# Altium PCB 普通背景抑制原理图-W-20251019 .PcbDoc
Units mm, origin at the board's own origin, x right, y up, seen from the top; angles counter-clockwise.
Board outline 28.9 x 9.6 mm, 4 copper layers (TopLayer, MidLayer1, MidLayer14, BottomLayer); 54 components, 29 nets, 136 pads, 38 vias.
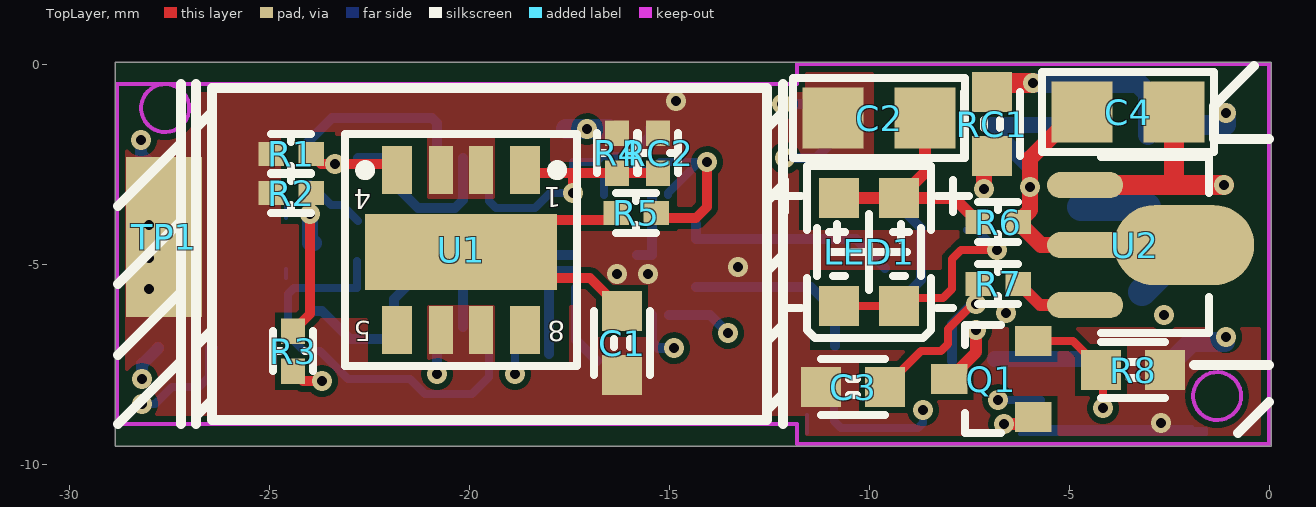
[diagram p0: TopLayer view]
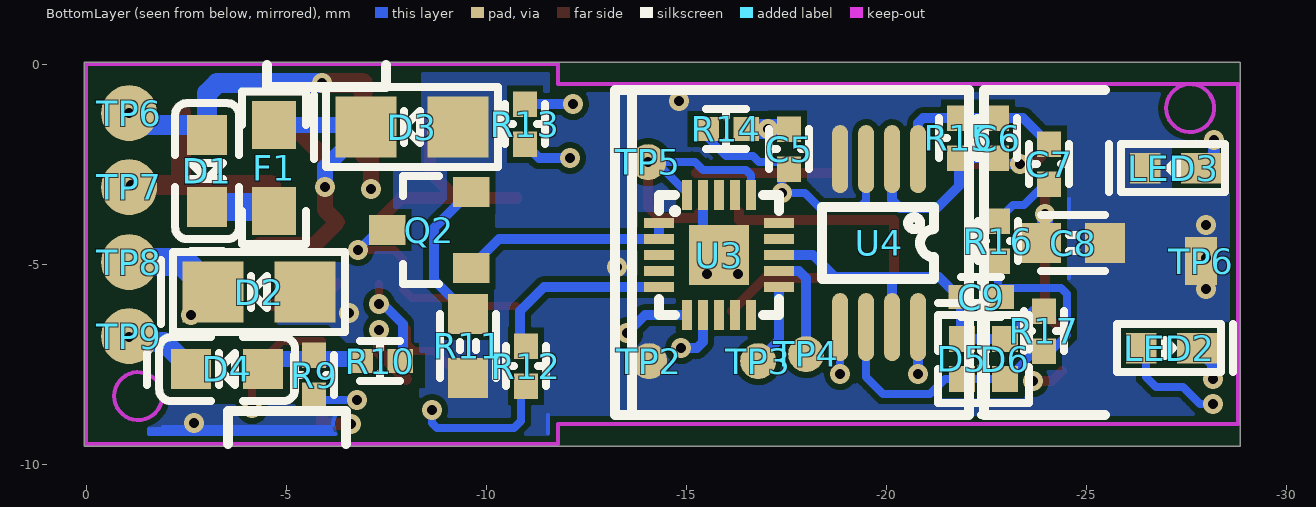
[diagram p1: BottomLayer view, seen from below]
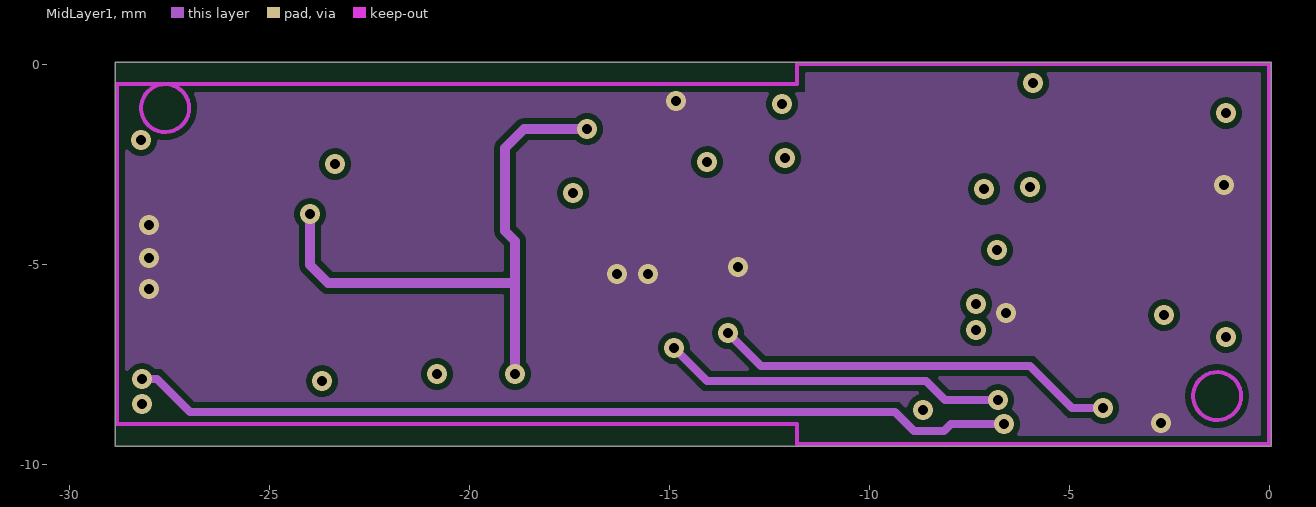
[diagram p2: MidLayer1]
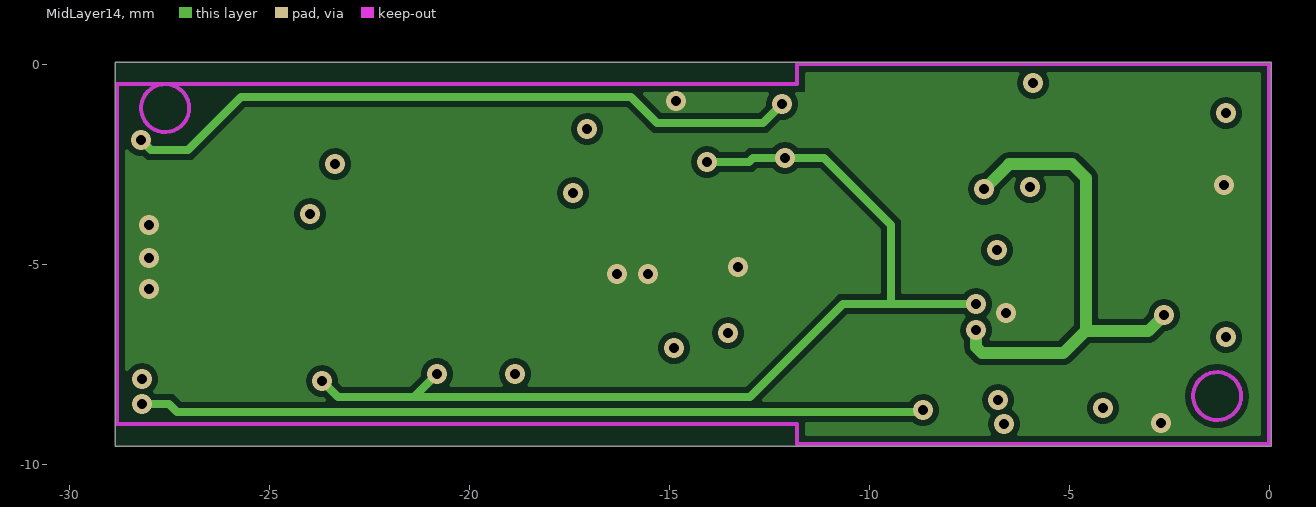
[diagram p3: MidLayer14]

## Layer stack, top to bottom
TopLayer: signal copper 0.0356
Dielectric: dielectric 0.32, FR-4, Dk 4.8
MidLayer1: signal copper 0.0356
Dielectric: dielectric 0.32, FR-4, Dk 4.8
MidLayer14: signal copper 0.0356
Dielectric: dielectric 0.32, FR-4, Dk 4.8
BottomLayer: signal copper 0.0356

## Board outline
-28.85,-9.55 0.05,-9.55 0.05,0.05 -28.85,0.05

## Design rules (kind name [scope] priority, off if disabled: settings)
Clearance [All] p1: gap=0.1
ComponentClearance [All] p1 off: gap=0.254 collisioncheckmode=0 verticalgap=0.254
PolygonConnect [All] p1: connectstyle=Relief reliefconductorwidth=0.254 reliefentries=4 polygonreliefangle="90 Angle"
RoutingLayers [All] p1: top layer_v5=TRUE mid layer 1_v5=FALSE mid layer 14_v5=FALSE bottom layer_v5=TRUE
RoutingVias [All] p1: holewidth=0.711 width=1.27 viastyle="Through Hole" minholewidth=0.711 minwidth=1.27 maxholewidth=0.711 maxwidth=1.27
SolderMaskExpansion [All] p1: expansion=0.051
TestPointUsage [All] p1: valid=0 allowmultiple=FALSE
Testpoint [All] p1: side=15 testpointundercomponent=TRUE minsize=1.016 maxsize=2.54 preferedsize=1.524 minholesize=0.508 maxholesize=1.016 preferedholesize=0.813 testpointgrid=0.025 style=1023 order=0123456789
Width [All] p1: maxlimit=0.254 minlimit=0.254 preferedwidth=0.254
17 further rules are at their usual default settings.

## Components (designator, comment, footprint, x,y, rotation, side; value= is the part's Value field where it differs from the comment)
C1 "9.1uF" 0603#1 -16.175,-7.775 r90 top
C2 "1uF" 1206#1 -10.9,-1.35 r0 top
C3 "9.1uF" 0603#1 -11.2,-8.075 r0 top
C4 "2.2uF" 1206#1 -4.675,-1.2 r0 top
C5 "10PF" 0402#1 -17.575,-1.625 r270 bottom
C6 "2PF" 0402#1 -22.775,-1.35 r270 bottom
C7 "1.5nF" 0402#1 -24.075,-2 r270 bottom
C8 "9.1uF" 0603#2 -25.475,-4.475 r180 bottom
C9 "10PF" 0402#2 -22.875,-5.825 r180 bottom
D1 "W2" 0805#1 -3.025,-1.775 r180 bottom
D2 "CM" 1206#2 -5.475,-5.7 r180 bottom
D3 "CG" 1206#2 -9.3,-1.575 r180 bottom
D4 "W2" 0805#2 -4.425,-7.625 r90 bottom
D5 "3" 0402#3 -21.9,-7.875 r90 bottom
D6 "3" 0402#3 -22.975,-6.875 r270 bottom
F1 "V" 0805#3 -4.7,-1.525 r270 bottom
LED1 "红色LED" 3528A -9.25,-3.35 r0 top
LED2 "红色LED" 0603#3 -26.375,-7.1 r0 bottom
LED3 "绿色LED" 0603#4 -27.875,-2.6 r180 bottom
Q1 "AJR" SOT-23 -5.9,-8.825 r90 top
Q2 "AJR" SOT-23 -9.625,-5.1 r90 bottom
R1 "420K" 0402#1 -24.95,-2.25 r0 top
R2 "4.7K" 0402#1 -24.95,-3.225 r0 top
R3 "4.2K" 0402#1 -24.4,-7.675 r90 top
R4 "420K" 0402#1 -16.3,-2.725 r90 top
R5 "10K" 0402#1 -16.325,-3.725 r0 top
R6 "10R" 0402#1 -7.275,-3.95 r0 top
R7 "10R" 0402#1 -7.275,-5.5 r0 top
R8 "3.9R/3R9" 0603#1 -4.2,-7.65 r0 top
R9 "680R" 0402#1 -5.7,-7.275 r270 bottom
R10 "10K" 0402#2 -7.85,-7.425 r180 bottom
R11 "12R/120" 0603#1 -9.55,-6.25 r270 bottom
R12 "2K" 0402#1 -11,-7.05 r270 bottom
R13 "4.7K" 0402#1 -10.975,-1 r270 bottom
R14 "499K" 0402#2 -16.5,-1.625 r180 bottom
R15 "499K" 0402#1 -21.825,-1.35 r270 bottom
R16 "1K" 0402#1 -22.8,-3.925 r270 bottom
R17 "29.4K" 0402#1 -23.95,-6.175 r270 bottom
RC1 "NC" 0603#1 -6.925,-2.3 r90 top
RC2 "NC" 0402#1 -15.275,-2.725 r90 top
TP1 "屏蔽铜皮" SIP1#1 -27.625,-4.325 r0 top
TP2 "" SIP1#2 -14.075,-7.425 r0 bottom
TP3 "" SIP1#2 -16.8,-7.425 r0 bottom
TP4 "" SIP1#2 -18,-7.25 r0 bottom
TP5 "" SIP1#2 -14.05,-2.45 r0 bottom
TP6 "" SIP1#3 -27.875,-4.925 r0 bottom
TP6 "" SIP1#4 -1.075,-1.225 r0 bottom
TP7 "" SIP1#4 -1.075,-3.075 r0 bottom
TP8 "" SIP1#4 -1.075,-4.95 r0 bottom
TP9 "" SIP1#4 -1.075,-6.8 r0 bottom
U1 "???" SOP-8 -18.6,-2.65 r0 top
U2 "7550-1" SOT89 -4.6,-3.025 r0 top
U3 "???" QFN20 -14.325,-3.975 r90 bottom
U4 "GS8722" SOP8 -20.8,-2.375 r270 bottom

## Footprints (in the part's own frame and the unit in brackets; to place one, negate y for a bottom-side part, rotate by r counter-clockwise, add the part's x,y. Pads: shape width x height; smd on the part's side, far side on the other; paste and mask are expansions set on the pad)
0402#1 [mm]
  rect 0.635x0.6 smd: 1(0,0) 2(1,0)
  silkscreen extent 0,-0.5 1,0.5
0402#2 [mm]
  rect 0.635x0.6 smd: 1(0,0) 2(-1,0)
  silkscreen extent -1,-0.5 0,0.5
0402#3 [mm]
  rect 0.65x0.65 smd: 1(0,0) 2(1,0)
  silkscreen extent -0.6,-0.6 1.9,0.6
0603#1 [mm]
  rect 1x1 smd: 1(0,0) 2(1.6,0)
  silkscreen extent 0,-0.7 1.6,0.7
0603#2 [mm]
  rect 1x1 smd: 1(0,0) 2(-1.6,0)
  silkscreen extent -1.6,-0.7 0,0.7
0603#3 [mm]
  rect 0.762x0.762 smd: 1(0,0)
  rect 1x0.762 smd: 2(-1.4,0)
  silkscreen extent -2.3,-0.6 0.6,0.6
0603#4 [mm]
  rect 1x0.762 smd: 1(0,0)
  rect 0.762x0.762 smd: 2(-1.4,0)
  silkscreen extent -2.3,-0.6 0.6,0.6
0805#1 [mm]
  rect 1x1 smd: 1(0,0) 2(0,-1.8)
  silkscreen extent -0.8,-2.9 0.8,0.8
0805#2 [mm]
  rect 1x1 smd: 1(0,0) 2(0,1.8)
  silkscreen extent -0.8,-0.8 0.8,2.9
0805#3 [mm]
  rect 1.2x1.1 smd: 1(0,0) 2(2.15,0)
  silkscreen extent -0.84,-0.8 2.98,0.8
1206#1 [mil]
  rect 60x60 smd: 1(0,0) 2(90.55,0)
  silkscreen extent -39,-39 130,39
1206#2 [mil]
  rect 60x60 smd: 1(0,0) 2(-90.55,0)
  silkscreen extent -142,-39 39,39
3528A [mm]
  rect 1x1 smd: 1(0,0) 2(-1.5,0) 3(-1.5,-2.7) 4(0,-2.7)
  silkscreen extent -3.25,-3.5 1.75,0.8
QFN20 [mm]
  rect 0.25x0.75 smd: 1(0,0) 2(-0.4,0) 3(-0.8,0) 4(-1.2,0) 5(-1.6,0) 11(-1.6,-3) 12(-1.2,-3) 13(-0.8,-3) 14(-0.4,-3) 15(0,-3)
  rect 0.75x0.25 smd: 6(-2.3,-0.7) 7(-2.3,-1.1) 8(-2.3,-1.5) 9(-2.3,-1.9) 10(-2.3,-2.3) 16(0.7,-2.3) 17(0.7,-1.9) 18(0.7,-1.5) 19(0.7,-1.1) 20(0.7,-0.7)
  rect 1.5x1.5 smd: 21(-0.8,-1.5)
  silkscreen extent -2.3,-3 0.7,0
SIP1#1 [mm]
  rect 1.9x4 smd: 1(0,0)
SIP1#2 [mm]
  round 0.9 smd: 1(0,0)
SIP1#3 [mm]
  rect 0.8x1.2 smd: 1(0,0)
SIP1#4 [mm]
  round 1.4 smd: 1(0,0)
SOP8 [mm]
  oval 1.7x0.4 smd: 1(0,0) 2(0,-0.65) 3(0,-1.3) 4(0,-1.95) 5(4.2,-1.95) 6(4.2,-1.3) 7(4.2,-0.65) 8(4.2,0)
  silkscreen extent 1.2,-2.4 3,0.4
SOP-8 [mm]
  rect 0.75x1.2 smd: 1(0,0) 4(-3.2,0) 5(-3.2,-4) 8(0,-4)
  rect 0.6x1.2 smd: 2(-1.1,0) 3(-2.1,0) 6(-2.1,-4) 7(-1.1,-4)
  rect 4.8x1.9 smd: 9(-1.6,-2.05)
  silkscreen extent -4.5,-4.9 1.3,0.9
SOT89 [mm]
  oval 3.5x2 smd: 0(2.475,-1.5)
  oval 1.9x0.65 smd: 1(0,0) 3(0,-3)
  oval 2.4x0.65 smd: 2(0.25,-1.5)
  silkscreen extent 0.4,-3.7 3.1,0.7
SOT-23 [mm]
  rect 0.75x0.914 smd: 1(0,0) 2(1.9,0) 3(0.95,2.1)
  silkscreen extent -0.4,0.8 2.3,1.7

## Via types
v1: diameter 0.5, hole 0.25, TopLayer to BottomLayer, 38 vias

## Nets (pads, with @x,y where several pads share a name; then routed paths per layer and width w, separated by ;. In a path a pad name is that pad's centre, name@x,y a point inside that pad or via, vN(x,y) a via of type N, cw(c..) or ccw(c..) an arc to the next point about the centre after c; other vN are vias at no path point)
UnNamedNet1: C3.2 R3.1 R5.2 R7.1 R10.1 R13.2 TP5.1 U3.16 U3.20 U4.8 | length 41.2
  TopLayer w0.2: C3.2 -8.7,-7.175 -8.2,-7.175 -8.025,-7 -8.025,-6.625 -7.4,-6 v1(-7.325,-6) R7.1@-7.325,-5.5
  TopLayer w0.25: R3.1 -24.15,-7.925 v1@-23.65,-7.925 ; R5.2 -15.325,-3.85 -14.325,-3.85 -14.05,-3.575 v1(-14.05,-2.45)
  MidLayer14 w0.2: v1(-23.675,-7.925) -23.275,-8.325 -12.975,-8.325 -10.65,-6 v1(-7.325,-6) ; -21.35,-8.3 v1(-20.8,-7.75) ; v1@-14.075,-2.45 -13,-2.45 -12.9,-2.35 -11.125,-2.35 -9.45,-4.025 -9.45,-5.975
  BottomLayer w0.2: U3.16 -16.625,-2.775 -16.5,-2.65 -15.425,-2.65 -15.225,-2.45 -14.25,-2.45 -15.025,-3.225 U3.20
  BottomLayer w0.25: v1@-20.8,-7.725 U4.8 ; v1@-12.075,-2.35 -11.325,-2.35 R13.2 ; R10.1@-7.925,-7.425 -7.925,-6.5 -7.425,-6 v1(-7.325,-6)
  other v1: -12.1,-2.35
UnNamedNet2: C1.2 R5.1 U1.9 | length 9.9
  TopLayer w0.25: R5.1@-16.325,-3.7 -16.325,-3.9 -20.2,-3.9 -20.2,-5.35 -16.975,-5.35 C1.2@-16.15,-6.175
UnNamedNet3: C1.1 C2.1 C3.1 C4.2 C8.1 D2.1 D3.1 LED3.2 R1.1 R2.1 R4.2 R8.2 R11.2 RC2.2 TP1.1 TP2.1 TP6.1@-27.875,-4.925 TP7.1 U1.2 U1.3 U1.6 U1.7 U2.1 U3.19 U3.21 U4.4 | length 26.3
  TopLayer w0.5: U2.1@-4.625,-3.025 v1(-1.125,-3.025) ; -2.375,-2.9 C4.2
  BottomLayer w0.1: -24.575,-5.35 -24.575,-5.125 ; -24.575,-3.85 -24.575,-3.375 ; -11.55,-9.225 -11.55,-8.775 ; -6.225,-9.25 -1.575,-9.25 -1.575,-9.125 ; -6.217,-8.81 cw(c-6.625,-9) -6.175,-9.024 ; -6.15,-9.2 -1.675,-9.2 ; -6.125,-9.125 -1.65,-9.125 ; -6.1,-9.075 -1.925,-9.075
  BottomLayer w0.25: U3.21@-15.8,-4.775 -15.425,-4.775 U3.19
  other v1: -2.7,-8.975 -6.575,-6.225 -28,-5.625 -16.3,-5.25 -15.525,-5.25 -13.275,-5.075 -28,-4.85 -28,-4.025 -14.825,-0.925
UnNamedNet4: C5.2 R4.1 R14.2 RC2.1 U1.1 U4.3 | length 10.3
  TopLayer w0.25: U1.1@-18.6,-2.725 RC2.1@-15.25,-2.725 ; v1(-17.4,-3.225) -17.4,-2.75
  BottomLayer w0.2: U4.3 -19.5,-3.425 -19.325,-3.6 -18.35,-3.6 -17.975,-3.225 v1(-17.4,-3.225) -17.4,-2.45 -16.825,-2.45 -16.675,-2.3 -16,-2.3 -15.5,-1.8 R14.2@-15.5,-1.6
UnNamedNet5: C2.2 LED1.1 LED1.2 R6.1 | length 6
  TopLayer w0.3: LED1.2 -7.875,-3.35 R6.1 ; LED1.1 -8.6,-2.7 C2.2@-8.6,-1.3
UnNamedNet6: C4.1 D3.2 F1.1 R6.2 U2.0 U2.2 | length 10
  TopLayer w0.4: C4.1 -4.825,-1.2 -5.975,-2.35 -5.975,-3.65 R6.2 -5.7,-4.525 U2.2
  BottomLayer w0.4: v1(-5.975,-3.075) -5.975,-2.575 -7.025,-1.525 F1.1
UnNamedNet7: R7.2 U2.3 | length 1.8
  TopLayer w0.3: R7.2@-6.25,-5.5 -5.725,-6.025 U2.3@-4.625,-6.025
UnNamedNet8: D2.2 Q1.3 RC1.1 TP8.1 | length 17.3
  TopLayer w0.3: Q1.3 -7.325,-7.2 v1(-7.325,-6.65)
  TopLayer w0.4: v1(-7.125,-3.125) -7.125,-2.3 RC1.1
  MidLayer14 w0.3: v1(-7.325,-6.65) -7.325,-7.075 -7.175,-7.225 -5.15,-7.225 -4.575,-6.65 -4.575,-2.85 -4.925,-2.5 -6.5,-2.5 v1(-7.125,-3.125) ; -4.575,-6.675 -3.025,-6.675 v1(-2.625,-6.275)
  BottomLayer w0.7: D2.2 -2.425,-4.95 TP8.1@-1.1,-4.95
UnNamedNet9: D1.1 RC1.2 TP6.1@-1.075,-1.225 | length 7.8
  TopLayer w0.5: RC1.2 -6.925,-0.475 v1(-5.9,-0.475)
  BottomLayer w0.5: v1(-5.9,-0.475) -3.275,-0.475 -3.025,-0.725 D1.1 -3.025,-1.525 -1.075,-1.525 v1(-1.075,-1.225)
UnNamedNet10: Q1.2 R8.1 U3.6 | length 14.8
  TopLayer w0.2: Q1.2 -4.9,-6.925 -4.15,-7.675 v1(-4.15,-8.6)
  MidLayer1 w0.2: v1(-13.525,-6.725) -12.7,-7.55 -5.975,-7.55 -4.925,-8.6 v1(-4.15,-8.6)
  BottomLayer w0.25: U3.6@-15,-6.275 -13.975,-6.275 v1(-13.525,-6.725)
UnNamedNet11: LED2.2 Q1.1 | length 23.9
  TopLayer w0.3: v1@-6.6,-9 -5.9,-9 Q1.1@-5.9,-8.85
  MidLayer1 w0.2: v1(-28.175,-7.875) -27.8,-7.875 -26.975,-8.7 -9.35,-8.7 -8.875,-9.175 -8.125,-9.175 -7.95,-9 v1(-6.625,-9)
  BottomLayer w0.3: v1@-28.175,-7.85 -28.175,-7.5 LED2.2
UnNamedNet12: C5.1 C8.2 R2.2 R3.2 R14.1 U4.5 | length 21.2
  TopLayer w0.25: R3.2 -23.975,-6.25 R2.2@-23.975,-3.225
  MidLayer1 w0.25: v1@-23.975,-3.775 -23.975,-5.025 -23.525,-5.475 -18.925,-5.475 ; v1(-18.85,-7.75) -18.85,-4.425 -19.1,-4.175 -19.1,-2.1 -18.625,-1.625 v1(-17.05,-1.625)
  BottomLayer w0.2: v1@-18.85,-7.725 U4.5
  BottomLayer w0.4: v1(-23.975,-3.75) -23.975,-4.475 C8.2
  BottomLayer w0.5: C5.1 R14.1
UnNamedNet13: C6.2 R1.2 R15.2 U1.4 U4.2 | length 7.7
  TopLayer w0.25: R1.2 -23.7,-2.5 U1.4@-21.8,-2.5
  BottomLayer w0.25: v1(-23.35,-2.5) -22.775,-2.5 C6.2 R15.2 -21.825,-3.05 -21.275,-3.6 -20.35,-3.6 -20.15,-3.4 U4.2@-20.15,-2.35
UnNamedNet16: LED1.3 LED1.4 Q2.3 | length 6
  TopLayer w0.2: LED1.3 LED1.4 -9.25,-5.85 -8.15,-5.85 -7.925,-5.625 -7.925,-4.875 -7.7,-4.65 v1(-6.8,-4.65)
  BottomLayer w0.2: Q2.3@-7.55,-4.15 -7.3,-4.15 v1(-6.8,-4.65)
UnNamedNet17: D4.2 TP9.1 | length 1.8
  BottomLayer w0.5: D4.2 -1.95,-6.95 TP9.1@-1.1,-6.95
  other v1: -1.075,-6.825
UnNamedNet18: TP3.1 U3.11 | length 2
  BottomLayer w0.25: U3.11@-17.325,-5.6 -17.325,-6.9 TP3.1
UnNamedNet19: TP4.1 U3.12 | length 2.6
  BottomLayer w0.25: TP4.1 -18,-5.35 -17.825,-5.175 U3.12
UnNamedNet20: D4.1 R9.1 R10.2 | length 2.4
  BottomLayer w0.4: R10.2@-6.85,-7.375 D4.1@-4.425,-7.375
UnNamedNet21: R9.2 U3.7 | length 11
  MidLayer1 w0.2: v1(-14.875,-7.1) -14.05,-7.925 -8.575,-7.925 -8.1,-8.4 v1@-6.75,-8.4
  BottomLayer w0.2: v1@-6.8,-8.4 R9.2@-5.7,-8.4
  BottomLayer w0.25: U3.7 -15.425,-6.95 -15.275,-7.1 v1@-14.9,-7.1
  other v1: -6.775,-8.4
UnNamedNet22: LED3.1 R13.1 | length 19.2
  MidLayer14 w0.2: v1(-28.2,-1.9) -27.95,-2.15 -27.025,-2.15 -25.7,-0.825 -15.95,-0.825 -15.3,-1.475 -12.65,-1.475 v1(-12.175,-1)
  BottomLayer w0.25: v1@-12.15,-1 R13.1
  BottomLayer w0.3: v1(-28.2,-1.9) -28.2,-2.25 LED3.1@-27.85,-2.6
UnNamedNet23: C6.1 C7.1 R15.1 U4.1 | length 4.5
  BottomLayer w0.25: C7.1 -23.425,-1.35 -20.925,-1.35 -20.8,-1.475 U4.1@-20.8,-2.35
UnNamedNet24: C9.2 D5.2 D6.1 R17.1 U3.13 U4.7 | length 9.6
  BottomLayer w0.25: R17.1 -23.675,-6.175 D6.1 -21.875,-6.875 -21.875,-5.875 -21.325,-5.325 -18.725,-5.325 -18.175,-4.775 U3.13 ; U4.7 -20.15,-5.35
UnNamedNet25: C9.1 D5.1 D6.2 R16.2 R17.2 U4.6 | length 10.5
  BottomLayer w0.2: R16.2 -22.8,-5.6 -24.375,-5.6 -24.525,-5.75 -24.525,-6.775 -24.125,-7.175 R17.2 -23.725,-7.175 -23.025,-7.875 -21.475,-7.875 -21.1,-8.25 -19.925,-8.25 -19.5,-7.825 U4.6
UnNamedNet26: C7.2 R16.1 | length 1.7
  BottomLayer w0.2: C7.2 -23.975,-3 -23.45,-3.525 -23.175,-3.525 R16.1@-22.775,-3.925
UnNamedNet27: D1.2 F1.2 | length 1.7
  BottomLayer w0.7: F1.2@-4.7,-3.575 D1.2@-3.05,-3.575
UnNamedNet28: Q2.1 U3.1 U3.2 | length 5.4
  BottomLayer w0.25: U3.1@-14.325,-4 U3.2 -10.325,-4.375 Q2.1@-9.6,-5.1
UnNamedNet29: Q2.2 R11.1 | length 3.8
  BottomLayer w0.25: Q2.2@-9.6,-3.2 -8.7,-4.1 -8.7,-5.4 R11.1
UnNamedNet30: R12.1 U3.5 | length 4.6
  BottomLayer w0.25: U3.5 -11.45,-5.575 -10.85,-6.175 R12.1@-10.85,-7.05
UnNamedNet31: LED2.1 R12.2 | length 26.1
  MidLayer14 w0.2: v1(-28.175,-8.5) -27.5,-8.5 -27.3,-8.7 v1@-8.65,-8.7
  BottomLayer w0.2: v1(-28.175,-8.5) -27.85,-8.5 -27.425,-8.075 -26.75,-8.075 -26.5,-7.825 -26.5,-7.1 LED2.1 ; R12.2 -10.875,-8.05 -10.875,-8.925 -10.7,-9.1 -8.775,-9.1 -8.65,-8.975 v1(-8.65,-8.65)
pads on no net: U1.5 U1.8 U3.3 U3.4 U3.8 U3.9 U3.10 U3.14 U3.15 U3.17 U3.18

## Polygon pours and split planes (outlines as drawn)
UnNamedNet3 on TopLayer "TopLayer-UnNamedNet3" (hatched 90Degree grid 0.05 track 0.1, remove dead copper, pour order 1000): 0,-9.5 0,-6.625 -7.95,-6.625 -7.95,-7.2 -11.525,-7.2 -11.525,-5.1 -7.55,-5.1 -7.55,-4.2 -11.8,-4.2 -11.8,-2.35 -9.925,-2.35 -9.925,0 -11.8,0 -11.8,-0.5 -28.8,-0.5 -28.8,-9 -11.8,-9 -11.8,-9.5
UnNamedNet3 on MidLayer1 "MidLayer1-UnNamedNet3" (hatched 90Degree grid 0.05 track 0.1, remove dead copper, pour order 1001): 0,-9.5 0,0 -28.8,0 -28.8,-9.475 -0.025,-9.475
UnNamedNet3 on MidLayer14 "MidLayer14-UnNamedNet3" (hatched 90Degree grid 0.05 track 0.1, remove dead copper, pour order 1002): 0,-9.5 0,0 -28.8,0 -28.8,-9.475 0,-9.475
UnNamedNet3 on BottomLayer "BottomLayer-UnNamedNet3" (hatched 90Degree grid 0.1 track 0.1, remove dead copper, pour order 1003): -28.8,-9 -11.8,-9 -11.8,-9.5 -1,-9.5 -1,-8.55 -8.375,-8.55 -8.375,-8.15 -8.525,-8.15 -8.525,-7.175 -6.775,-7.175 -6.075,-6.475 -4.825,-6.475 -4.825,-5 -6.75,-5 -6.75,-4.7 -7.725,-3.725 -7.725,-2.625 -8.425,-2.625 -8.425,0 -28.8,0

## Keep-outs
KeepOutLayer:
  circle w0.1: c-27.6,-1.1 r0.6
  circle w0.1: c-1.3,-8.3 r0.6
  lines w0.1: -28.8,-9 -11.8,-9 -11.8,-9.5 0,-9.5 0,0 -11.8,0 -11.8,-0.5 -28.8,-0.5 -28.8,-9

## Silkscreen, mask and mechanical layers (free items; w line width, h text height)
TopOverlay:
  lines w0.25: -28.775,-9 -27.2,-7.425 ; -28.775,-7.275 -27.2,-5.7 ; -28.775,-5.5 -27.2,-3.925 ; -28.775,-3.55 -27.2,-1.975 ; -27.2,-9 -27.2,-0.5 ; -26.825,-9 -26.825,-0.5 ; -26.825,-8.8 -26.425,-8.4 ; -26.825,-7.05 -26.425,-6.65 ; -26.825,-1.6 -26.425,-1.2 ; -12.55,-8.65 -12.15,-8.25 ; -12.55,-6.925 -12.15,-6.525 ; -12.55,-5.175 -12.15,-4.775 ; -12.55,-3.425 -12.15,-3.025 ; -12.55,-1.6 -12.15,-1.2 ; -12.15,-9 -12.15,-0.5 ; -1.875,-7.525 0,-7.525 ; -0.775,-9.225 0,-8.45 ; -0.375,-0.05 -1.375,-1.05 -1.375,-1.875 0,-1.875 ; -26.425,-8.9 -12.55,-8.9 -12.55,-0.6 -26.425,-0.6 -26.425,-8.9
BottomOverlay:
  lines w0.25: -25.475,-8.775 -22.45,-8.775 -22.45,-0.65 -25.475,-0.65 ; -13.65,-8.775 -13.65,-0.675 ; -7.5,-0.025 -7.5,-0.575 -4.525,-0.575 -4.525,-0.025 ; -6.5,-9.5 -6.5,-8.675 -3.55,-8.675 -3.55,-9.5 ; -22.075,-8.775 -13.225,-8.775 -13.225,-0.65 -22.075,-0.65 -22.075,-8.775
TopSolder:
  lines w0.25: -26.925,-2.45 -26.925,-0.85 ; -26.775,-0.85 -26.775,-2.525 -27.075,-2.525 -27.075,-0.8 -26.625,-0.8 ; -26.65,-0.95 -14.175,-0.95 ; -23.675,-8.65 -14.2,-8.65 ; -26.725,-1.05 -14.1,-1.05 -14.1,-0.8 -26.725,-0.8 -26.725,-1.05 ; -23.75,-8.775 -14.075,-8.775 -14.075,-8.525 -23.75,-8.525 -23.75,-8.775
BottomSolder:
  lines w0.25: -20.55,-0.825 -12.85,-0.825 -12.85,-0.7 -20.55,-0.7 -20.55,-0.825 ; -19.5,-8.725 -12.85,-8.725 -12.85,-8.575 -19.5,-8.575 -19.5,-8.725

## Text inside footprints (layer, text, board x,y; h text height)
U1: TopOverlay "4" at -22.45,-3.125 h0.5 r180; TopOverlay "8" at -17.6,-6.425 h0.5 r180; TopOverlay "5" at -22.45,-6.425 h0.5 r180; TopOverlay "1" at -17.7,-3.075 h0.5 r180